# EAGLE board DC_DC_V1.4.2-1(top) (EAGLE 7.7.0)
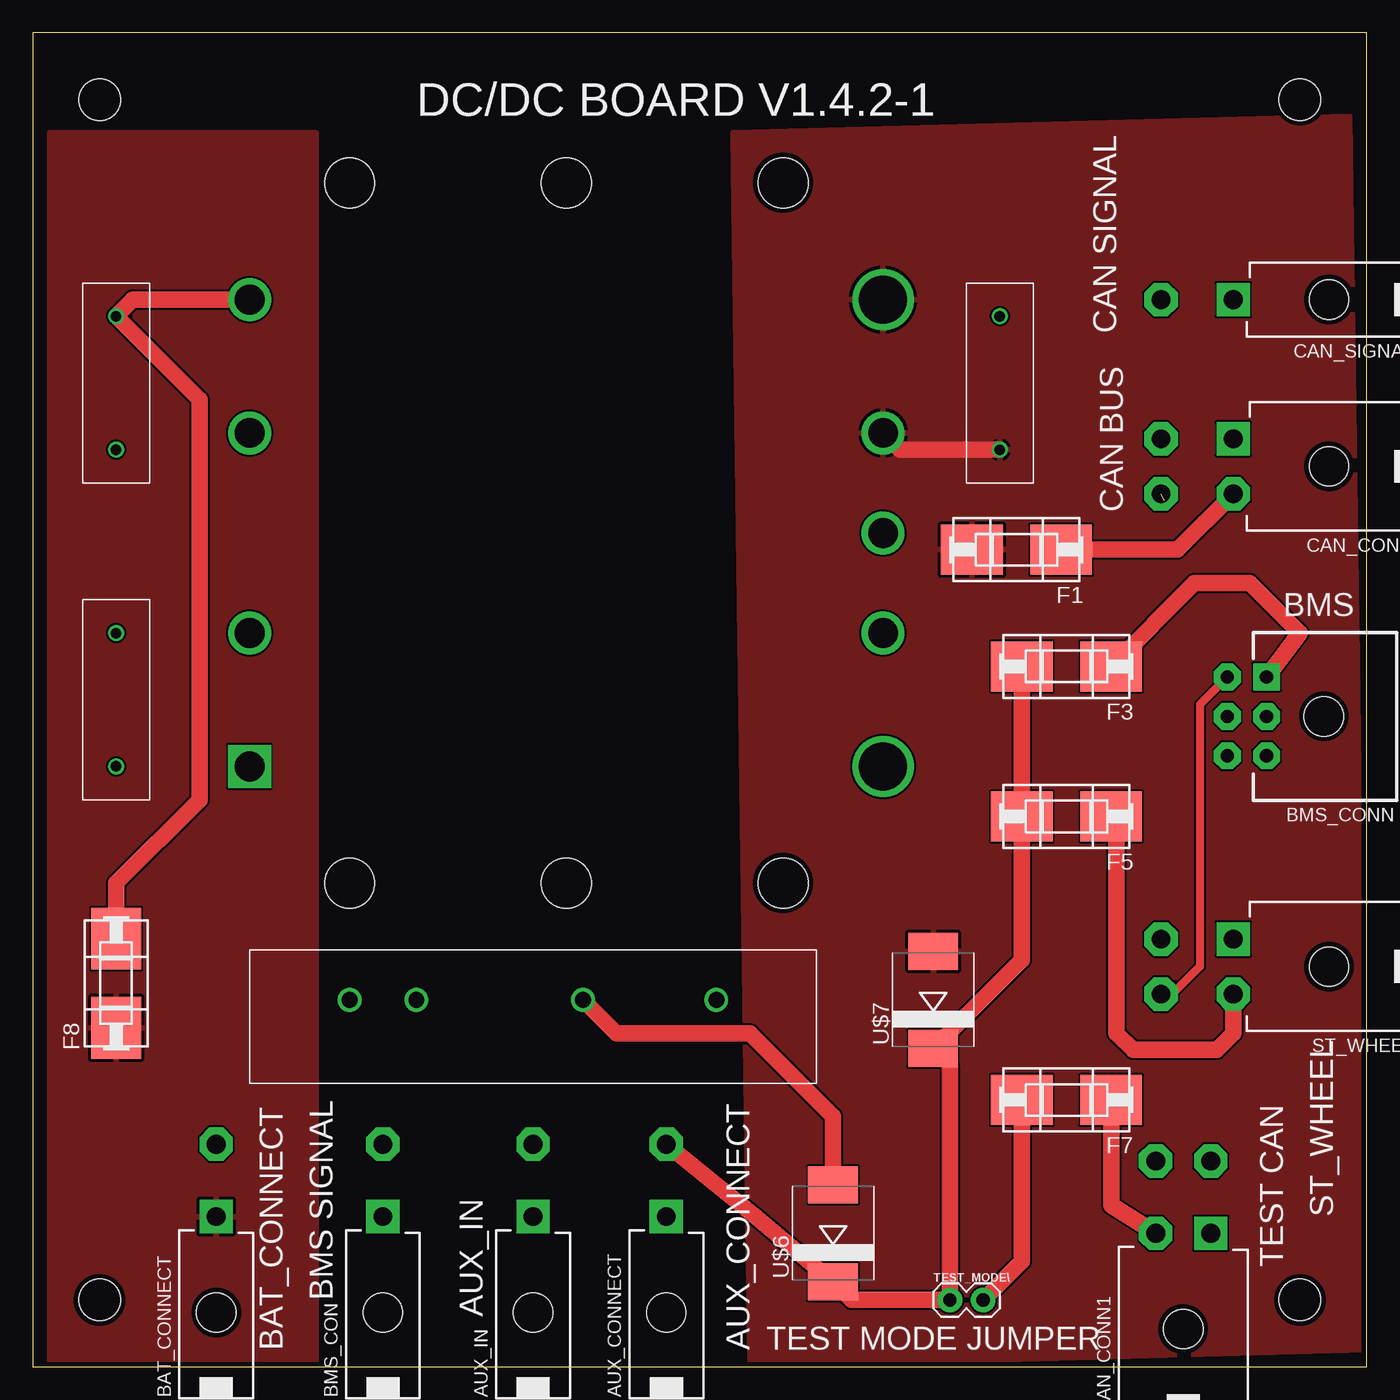
[diagram p0: board, top side]
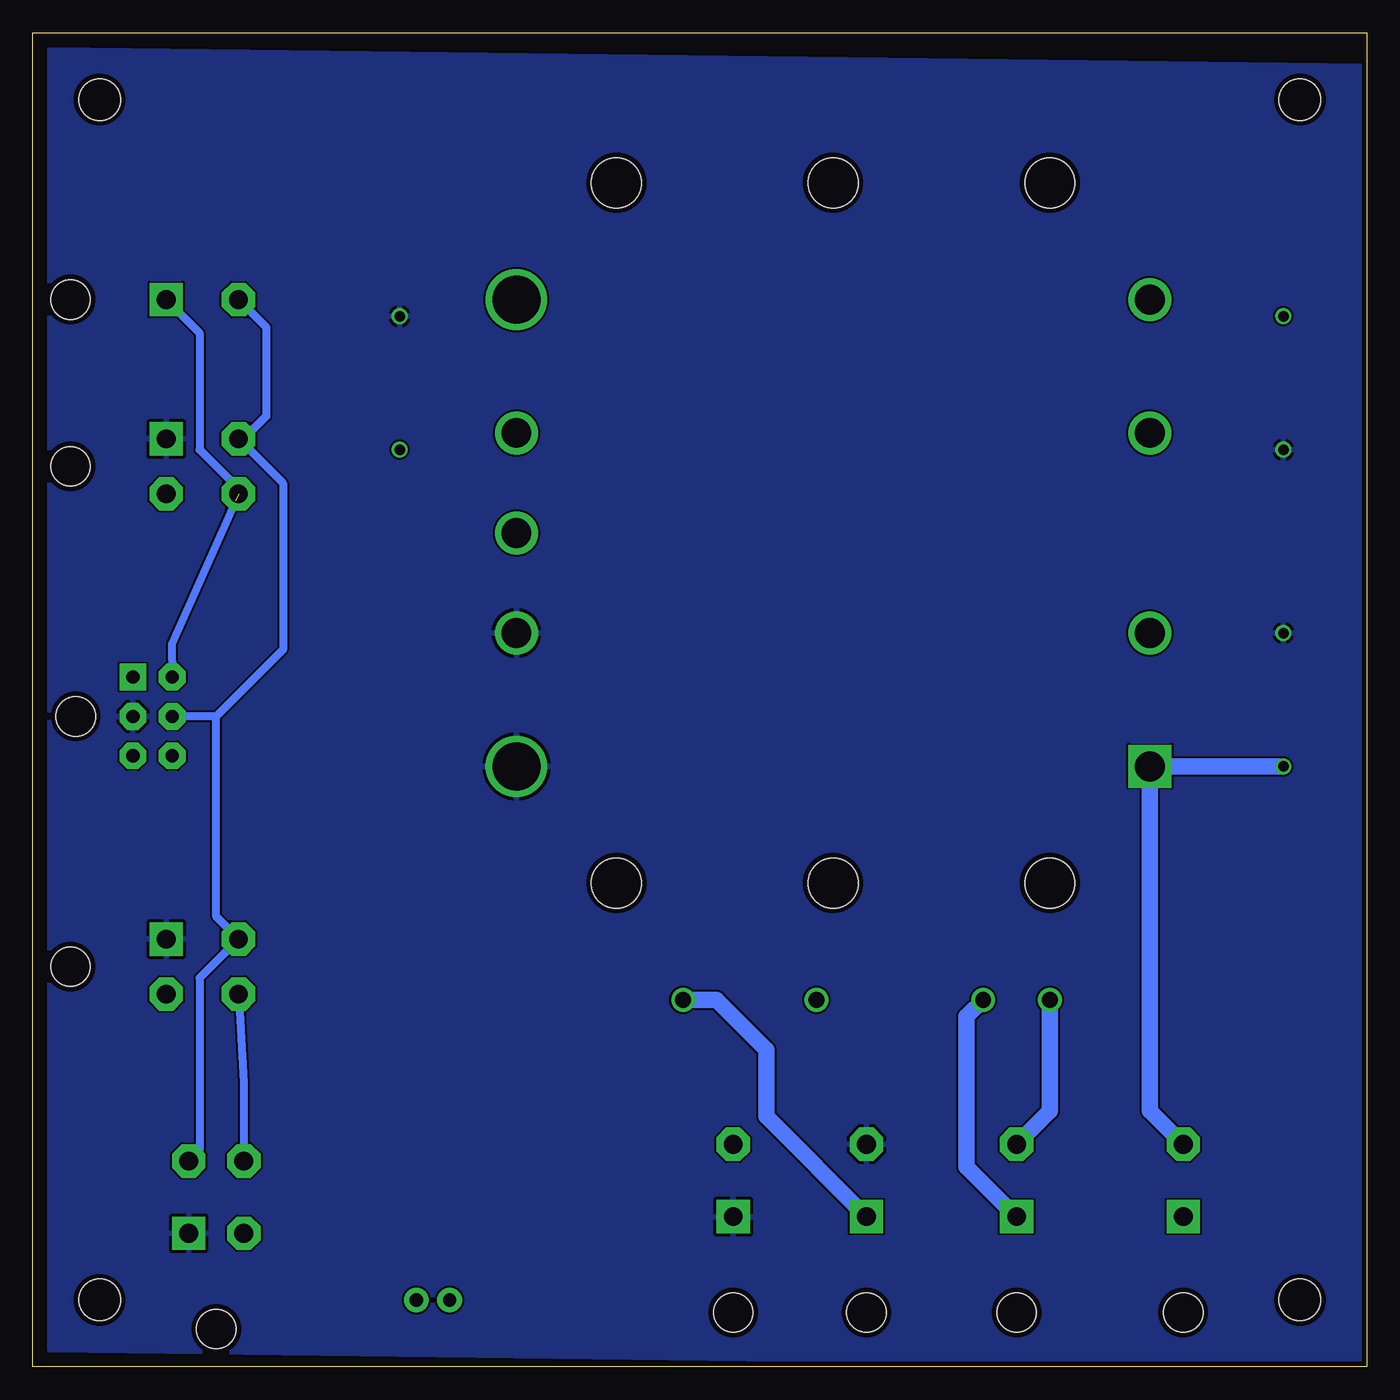
[diagram p1: board, bottom side, seen from below]

Size 101.6 x 101.6 mm. Coordinates in mm from the lower left corner, seen from the top.
Outline: 0,0 101.6,0 101.6,101.6 0,101.6 0,0
Copper layers (1*16): Top 0.0356mm / dielectric 1.5011mm / Bottom 0.0356mm
Design rules "LaenPCBOrder": minimum track width 6mil, minimum drill 13mil, track to track 6mil, track to pad 6mil, pad to pad 6mil, via to via 6mil, smd to smd 6mil, copper to edge 15mil, drill to drill 6mil, minimum pad ring 7mil, minimum via ring 7mil, stop-mask expansion 3mil, vias tented up to drill 0mil, thermal gap 10mil
Holes 3.17 mm at 5.08,96.52 96.52,96.52 96.52,5.08 5.08,5.08

## Footprints (pad centres in the part's own frame; a part is rotated, then mirrored left to right if it is on the bottom)
39-30-?02? = drill 1.422 pad 2.54 square: 1 0,0 | drill 1.422 pad 2.54 octagon: 2 0,5.512 | hole 3: 0,-7.3
43045-06 = drill 1.016 pad 2.032 square: 1 3,0 | drill 1.016 pad 2.032 octagon: 2 0,0; 3 -3,0; 4 3,3; 5 0,3; 6 -3,3 | hole 3: 0,-4.35
39-30-?04? = drill 1.422 pad 2.54 square: 1 2.095,0 | drill 1.422 pad 2.54 octagon: 2 -2.095,0; 3 2.095,5.512; 4 -2.095,5.512 | hole 3: 0,-7.3
OMNIBLOK = smd 4.7 x 3.8: P$1 -3.4,0; P$2 3.4,0
1X02 = drill 1.016 pad 1.88: 1 0,0; 2 2.54,0
MPDCD3B = drill 1.2: P$1 0,27.94; P$2 0,17.78; P$3 0,5.08; P$4 0,0
SMC = smd 2.8 x 3.8: A 3.7,0; C -3.7,0
Y2_CAP = drill 0.8: P$1 0,0; P$2 10.16,0
VI-J00 = drill 2.261 square: P$1 0,0 | drill 2.261: P$2 0,10.16; P$3 0,25.4; P$4 0,35.56; P$6 48.26,10.16; P$7 48.26,17.78; P$8 48.26,25.4 | drill 3.658: P$5 48.26,0; P$9 48.26,35.56 | hole 3.81: 7.62,-8.89; 24.13,-8.89; 40.64,-8.89; 40.64,44.45; 24.13,44.45; 7.62,44.45

## Placement (x,y rotation side)
AUX_CONNECT  39-30-02?_S  [39-30-?02?]  48.26,11.43 0 top
AUX_IN  39-30-02?_S  [39-30-?02?]  38.1,11.43 0 top
BAT_CONNECT  39-30-02?_S  [39-30-?02?]  13.97,11.43 0 top
BMS_CON  39-30-02?_S  [39-30-?02?]  26.67,11.43 0 top
BMS_CONN  43045-06  [43045-06]  93.98,49.53 90 top
CAN_CONN  39-30-04?  [39-30-?04?]  91.44,68.58 90 top
CAN_CONN1  39-30-04?  [39-30-?04?]  87.63,10.16 0 top
CAN_SIGNAL  39-30-02?_S  [39-30-?02?]  91.44,81.28 90 top
F1  4A  [OMNIBLOK]  74.93,62.23 180 top
F3  1.5A  [OMNIBLOK]  78.74,53.34 180 top
F5  1A  [OMNIBLOK]  78.74,41.91 180 top
F7  4A  [OMNIBLOK]  78.74,20.32 180 top
F8  2A  [OMNIBLOK]  6.35,29.21 90 top
ST_WHEEL  39-30-04?  [39-30-?04?]  91.44,30.48 90 top
TEST_MODE\  [1X02]  69.85,5.08 0 top
U$2  MPDCD3B  [MPDCD3B]  24.13,27.94 270 top
U$6  SL44HE3  [SMC]  60.96,10.16 90 top
U$7  SL44HE3  [SMC]  68.58,27.94 90 top
U$8  4700PF  [Y2_CAP]  6.35,45.72 90 top
U$9  4700PF  [Y2_CAP]  6.35,69.85 90 top
U$10  4700PF  [Y2_CAP]  73.66,80.01 270 top
U$11  VI-JT1-EW  [VI-J00]  16.51,45.72 0 top

## Library data of the parts
AUX_CONNECT AUX_IN BAT_CONNECT BMS_CON CAN_CONN CAN_CONN1 CAN_SIGNAL ST_WHEEL = con-molex-mini-fit
BMS_CONN = con-molex-micro-fit
F1 F3 F5 F7 F8 = f-lf-omniblok-s
TEST_MODE\ = SparkFun-Connectors
U$2 U$8-U$11 = NUSOLAR_Custom
U$6 U$7 = diode

## Nets
12V: F1.P$2 U$7.A U$10.P$2 U$11.P$8 U$11.P$9
AUX_12V: AUX_CONNECT.2 F3.P$2 F5.P$2 TEST_MODE\.1 U$6.C U$7.C
CAN+: CAN_CONN.2 F1.P$1
CAN_H: BMS_CONN.4 CAN_CONN1.4 CAN_CONN.4 CAN_SIGNAL.1 ST_WHEEL.4
CAN_L: BMS_CONN.5 CAN_CONN1.3 CAN_CONN.3 CAN_SIGNAL.2 ST_WHEEL.3
GND: AUX_CONNECT.1 AUX_IN.2 BMS_CONN.2 CAN_CONN1.1 CAN_CONN.1 ST_WHEEL.1 U$8.P$2 U$9.P$1 U$10.P$1 U$11.P$5 U$11.P$6
IN+: BAT_CONNECT.1 F8.P$1
IN-: BAT_CONNECT.2 U$8.P$1 U$11.P$1
N$1: AUX_IN.1 U$2.P$1
N$2: BMS_CON.1 U$2.P$3
N$3: BMS_CON.2 U$2.P$4
N$4: U$2.P$2 U$6.A
N$6: BMS_CONN.1 F3.P$1
N$7: F5.P$1 ST_WHEEL.2
N$10: CAN_CONN1.2 F7.P$1
N$12: F8.P$2 U$9.P$2 U$11.P$4
N$13: F7.P$2 TEST_MODE\.2
SHIELD: BMS_CONN.3
SHIELD_GND: BMS_CONN.6

## Tracks (layer width: path | path; a pad name or v marks a point on that pad's centre or on a via)
12V
  Top 1.27: U$11.P$8 66.04,69.85 U$10.P$2
  pour Top: 100.33,95.25 53.34,93.98 54.61,0 101.6,1.27
AUX_12V
  Top 1.27: F3.P$2 F5.P$2 75.34,31 U$7.C 69.85,22.97 TEST_MODE\.1 62.34,5.08 U$6.C 54.93,11.54 AUX_CONNECT.2
CAN+
  Top 1.27: CAN_CONN.2 87.19,62.23 F1.P$1
CAN_H  (1 unrouted)
  Top 0.61: BMS_CONN.4 88.9,50.45 88.9,30.48 86.81,28.38 ST_WHEEL.4
  Bottom 0.61: CAN_CONN.4 91.01,55.04 BMS_CONN.4 | ST_WHEEL.4 85.53,21.64 CAN_CONN1.4 | CAN_SIGNAL.1 88.9,78.74 88.9,69.85 86.16,67.11 86.16,65.95
CAN_L
  Bottom 0.61: CAN_SIGNAL.2 83.82,79.17 83.82,72.39 85.53,70.67 CAN_CONN.3 82.55,67.3 82.55,54.61 87.63,49.53 | 87.63,49.53 BMS_CONN.5 | 87.63,49.53 87.63,34.28 ST_WHEEL.3 88.9,29.6 88.9,16.5 CAN_CONN1.3
GND
  pour Bottom: 0,99.06 100.33,100.33 100.33,1.27 0,0
IN+
  pour Top: 21.59,93.98 1.27,93.98 1.27,0 21.59,0
IN-
  Bottom 1.27: U$8.P$1 U$11.P$1 16.51,19.48 BAT_CONNECT.2
N$1
  Bottom 1.27: AUX_IN.1 45.72,19.05 45.72,24.13 49.53,27.94 U$2.P$1
N$2
  Bottom 1.27: U$2.P$3 30.48,26.67 30.48,15.24 BMS_CON.1
N$3
  Bottom 1.27: U$2.P$4 24.13,19.48 BMS_CON.2
N$4
  Top 1.27: U$2.P$2 44.45,25.4 54.61,25.4 60.96,19.05 U$6.A
N$6
  Top 1.27: F3.P$1 88.49,59.69 92.71,59.69 96.52,55.88 BMS_CONN.1
N$7
  Top 1.27: F5.P$1 82.55,41.5 82.55,25.4 83.82,24.13 90.17,24.13 91.44,25.4 ST_WHEEL.2
N$10
  Top 1.27: F7.P$1 82.14,12.28 CAN_CONN1.2
N$12
  Top 1.27: F8.P$2 6.35,36.83 12.7,43.18 12.7,73.66 U$9.P$2 7.62,81.28 U$11.P$4
N$13
  Top 1.27: TEST_MODE\.2 75.34,8.03 F7.P$2

## Text on the board
tPlace: DC/DC BOARD V1.4.2-1 | CAN SIGNAL | CAN BUS | BMS | ST_WHEEL | TEST CAN | BMS SIGNAL | AUX_IN | BAT_CONNECT | AUX_CONNECT | TEST MODE JUMPER